# Altium PCB Display_SACA.PcbDoc (part 2 of 2)
Units mm, origin at the board's own origin, x right, y up, seen from the top; angles counter-clockwise.
Board outline 138.94 x 67.56 mm, 2 copper layers (Top Layer, Bottom Layer); 92 components, 109 nets, 417 pads, 161 vias.
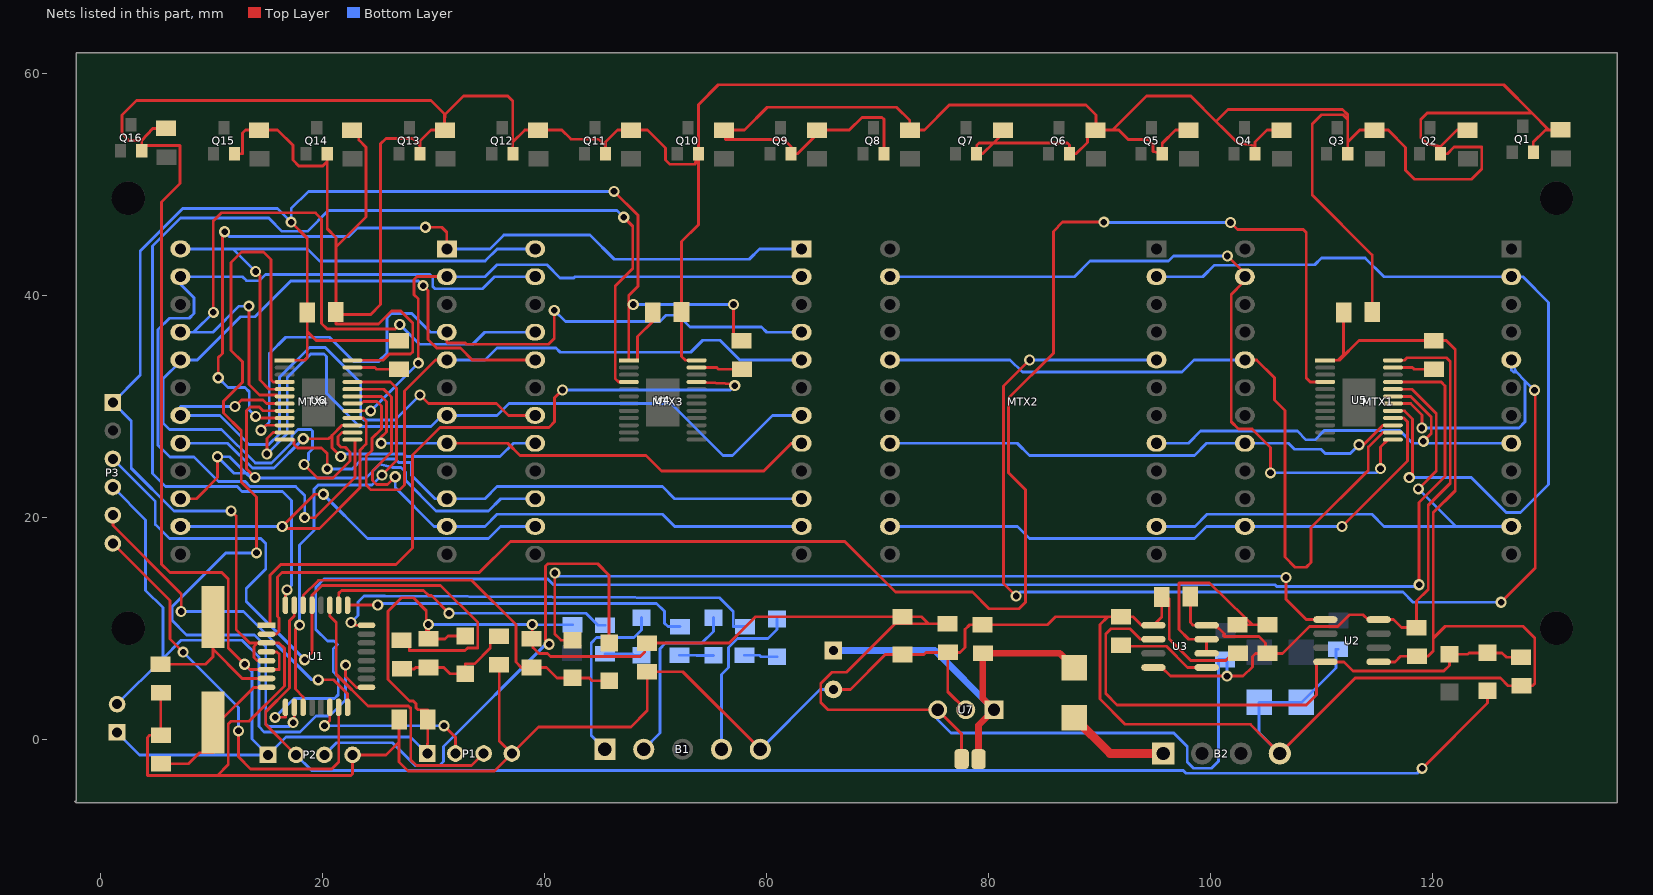
[diagram p2: the nets of this part, all layers, seen from the top]

## Via types
v1: diameter 1, hole 0.6, Top Layer to Bottom Layer, 161 vias

## Nets (pads, with @x,y where several pads share a name; then routed paths per layer and width w, separated by ;. In a path a pad name is that pad's centre, name@x,y a point inside that pad or via, vN(x,y) a via of type N, cw(c..) or ccw(c..) an arc to the next point about the centre after c; other vN are vias at no path point) (continued)
F8: MTX1.23 MTX2.23 U5.13 | length 67.5
  Top Layer w0.254: v1(101.533,43.545) 103.111,41.967 MTX1.23@103.111,41.68 102.956,41.68 102.956,41.162 101.884,40.091 101.884,28.61 102.544,27.949 103.768,27.949 105.419,26.298 v1(105.419,24.012) ; v1(115.325,24.393) 115.325,26.337 115.986,26.997 U5.13@116.447,26.997
  Bottom Layer w0.254: MTX2.23@71.149,41.68 87.766,41.68 89.174,43.088 96.225,43.088 96.682,43.545 v1(101.533,43.545) ; v1(105.419,24.012) 114.944,24.012 v1(115.325,24.393)
F9: MTX1.20 MTX2.20 U5.14 | length 71
  Top Layer w0.254: MTX1.20@103.111,34.18 104.175,34.18 105.772,32.583 105.772,30.567 106.715,29.624 106.715,16.418 107.629,15.503 108.645,15.503 109.077,15.935 109.077,19.085 114.233,24.241 114.233,26.342 115.538,27.647 U5.14@116.447,27.647
  Bottom Layer w0.254: MTX2.20@71.149,34.18 81.968,34.18 83.067,33.08 97.444,33.08 98.544,34.18 MTX1.20@103.111,34.18
F10: MTX1.17 MTX2.17 U5.15 | length 47.6
  Top Layer w0.254: v1(113.385,26.542) 113.791,26.542 115.546,28.297 U5.15@116.447,28.297
  Bottom Layer w0.254: MTX2.17@71.149,26.68 82.61,26.68 83.702,25.587 98.561,25.587 99.654,26.68 MTX1.17@103.111,26.68 107.046,26.68 107.59,26.136 109.975,26.136 110.347,25.764 112.607,25.764 v1(113.385,26.542)
F11: MTX1.14 MTX2.14 U5.16 | length 54.9
  Top Layer w0.254: v1(111.856,19.18) 117.764,25.088 117.764,28.61 117.427,28.947 U5.16@116.447,28.947
  Bottom Layer w0.254: MTX2.14@71.149,19.18 82.617,19.18 83.702,18.094 98.568,18.094 99.654,19.18 MTX1.14@103.111,19.18 v1(111.856,19.18)
F12: MTX1.2 MTX2.2 U5.17 | length 76.5
  Top Layer w0.254: U5.17@116.447,29.597 117.477,29.597 118.218,28.857 118.218,23.882 v1(117.916,23.581)
  Bottom Layer w0.254: MTX2.2@95.149,41.68 99.322,41.68 100.36,42.718 102.63,42.718 102.67,42.758 109.412,42.758 110.017,43.362 113.948,43.362 115.63,41.68 MTX1.2@127.111,41.68 128.152,41.68 130.475,39.358 130.475,22.957 127.949,20.431 126.654,20.431 123.504,23.581 v1(117.916,23.581)
F13: MTX1.5 MTX2.5 U5.18 | length 121.1
  Top Layer w0.254: v1(82.509,12.913) 81.366,14.056 81.366,31.821 v1(83.725,34.18) ; U5.18@116.447,30.247 118.046,30.247 119.059,29.234 v1(119.059,28.051) ; v1(126.197,12.354) 129.27,15.427 129.27,31.378 v1(129.194,31.455)
  Bottom Layer w0.254: v1(82.509,12.913) 82.864,13.268 117.357,13.268 118.272,12.354 v1(126.197,12.354) ; v1(83.725,34.18) MTX2.5@95.149,34.18 ; v1(119.059,28.051) 127.797,28.051 128.356,28.61 128.356,32.293 ; v1(129.194,31.455) 128.356,32.293 ; 127.568,33.08 128.356,32.293 ; 127.568,33.08 MTX1.5@127.111,34.18 127.111,33.283 127.314,33.08 127.568,33.08
F14: MTX1.8 MTX2.8 U5.19 | length 40.5
  Top Layer w0.254: U5.19@116.447,30.897 118.052,30.897 119.897,29.052 119.897,27.568 v1(119.187,26.857)
  Bottom Layer w0.254: MTX2.8@95.149,26.68 98.029,26.68 99.12,27.772 107.847,27.772 108.634,26.984 109.422,26.984 110.262,27.823 117.065,27.823 118.208,26.68 v1@119.364,26.68 ; v1(119.187,26.857) v1@119.364,26.68 ; MTX1.8@127.111,26.68 v1@119.364,26.68
F15: MTX1.11 MTX2.11 U5.20 | length 49.9
  Top Layer w0.254: U5.20@116.447,31.547 118.154,31.547 120.351,29.35 120.351,24.173 v1(118.743,22.565)
  Bottom Layer w0.254: MTX2.11@95.149,19.18 98.606,19.18 99.704,20.279 114.557,20.279 115.656,19.18 122.128,19.18 ; v1(118.743,22.565) 122.128,19.18 ; MTX1.11@127.111,19.18 122.128,19.18
GND: B1.5 B2.4 C1.1 C2.1 C3.1 C4.1 C5.1 C6.1 C7.1 C8.2 C9.2 C10.2 C11.2 C12.1 C13.1 C14.1 C15.1 C16.1 P1.4 P2.4 P3.1 R9.1 R10.1 R16.1 R29.1 R30.1 TVS1.1 TVS2.1 U1.3 U1.5 U2.5 U3.1 U4.1 U5.1 U6.1 U7.3 | length 453.7
  Top Layer w0.254: C1.1@5.461,4.191 C2.1@5.461,0.381 4.47,0.381 4.251,0.162 4.251,-3.242 10.576,-3.242 ; v1(11.801,20.583) 12.252,20.133 12.252,9.915 13.481,8.687 14.157,8.687 ; U1.5@14.986,7.087 14.157,7.087 13.852,7.392 13.852,8.382 14.157,8.687 ; U6.1@16.621,34.147 18.424,34.147 18.653,34.376 18.653,36.738 ; v1(17.205,46.593) 18.653,45.145 C14.1@18.653,38.465 18.653,36.738 ; R30.1@26.908,35.925 19.466,35.925 18.653,36.738 ; C12.1@26.924,1.778 26.924,-0.229 ; C3.1@35.941,6.731 35.941,-0.127 P1.4@37.084,-1.27 ; v1(46.288,49.362) 48.433,47.217 48.433,40.813 47.609,39.989 47.609,38.77 ; v1(48.015,39.176) 47.609,38.77 ; C15.1@49.784,38.465 49.784,37.662 48.403,36.281 48.403,34.147 U4.1@47.625,34.147 47.609,34.147 47.609,38.77 ; v1(57.052,39.176) 57.052,35.925 R16.1@57.785,35.925 ; B1.5@59.466,-0.889 52.481,6.096 C13.1@49.276,6.096 49.276,2.6 47.803,1.127 39.481,1.127 P1.4@37.084,-1.27 ; C9.2@66.04,4.501 67.573,4.501 70.721,7.649 C11.2@72.263,7.649 74.203,7.649 74.387,7.833 C10.2@76.354,7.833 ; U7.3@77.978,2.667 76.354,4.291 C10.2@76.354,7.833 ; C5.1@95.631,12.827 C5.1@95.631,12.633 ; C7.1@102.489,7.747 102.016,7.747 101.389,7.12 98.231,7.12 96.301,9.05 96.301,12.633 C5.1@95.631,12.633 ; U5.1@110.347,34.147 111.49,34.147 ; C16.1@111.998,38.465 111.998,34.655 111.49,34.147 ; U2.5@115.163,6.985 116.621,6.985 117.129,7.493 C4.1@118.618,7.493 119.618,7.493 120.075,7.95 120.075,7.961 ; 10.576,-3.242 22.606,-3.242 22.733,-3.115 P2.4@22.733,-1.397 25.756,-1.397 26.924,-0.229 ; 10.576,-3.242 11.541,-2.277 11.541,1.381 11.795,1.635 13.419,1.635 16.592,4.809 16.592,8.208 16.113,8.687 U1.3@14.986,8.687 14.157,8.687 ; 26.924,-0.229 26.924,-2.038 27.722,-2.835 35.519,-2.835 P1.4@37.084,-1.27 ; C10.2@76.354,7.833 77.454,7.833 77.911,8.29 77.911,9.915 78.324,10.328 C8.2@79.475,10.328 85.328,10.328 86.049,11.049 90.764,11.049 ; 90.764,11.049 C6.1@91.948,11.049 93.024,11.049 93.786,10.287 U3.1@94.869,10.287 95.631,11.049 C5.1@95.631,12.633 ; 90.764,11.049 90.056,10.341 90.056,3.638 92.337,1.357 103.631,1.357 B2.4@106.258,-1.27 113.049,5.521 126.136,5.521 126.832,4.826 R9.1@128.016,4.826 129.007,4.826 129.219,5.039 129.219,9.128 128.152,10.195 121.167,10.195 120.086,9.114 ; 111.49,34.147 111.617,34.147 113.395,35.925 R29.1@120.126,35.925 121.248,35.925 122.061,35.112 122.061,22.401 120.086,20.426 120.086,9.114 ; 120.075,7.961 120.075,9.103 120.086,9.114 ; 120.075,7.961 120.086,7.961 120.086,9.114
  Bottom Layer w0.254: v1(11.801,20.583) 6.639,20.583 2.803,24.419 2.803,28.693 P3.1@1.143,30.353 3.616,32.826 3.616,43.984 7.445,47.812 15.986,47.812 v1(17.205,46.593) 17.205,47.812 18.755,49.362 v1(46.288,49.362) ; v1(48.015,39.176) v1(57.052,39.176) ; B1.5@59.466,-0.889 64.856,4.501 C9.2@66.04,4.501 ; B2.4@106.258,-1.27 104.394,0.594 TVS1.1@104.394,3.338 106.283,3.338 TVS2.1@108.204,3.338 111.312,6.446 111.312,8.128 R10.1@111.506,8.128
LED1W: B1.4 D3.2 | length 15.4
  Bottom Layer w0.254: B1.4@55.966,-0.889 55.966,5.852 56.601,6.486 56.601,8.29 57.413,9.103 60.147,9.103 60.96,9.915 D3.2@60.96,10.846
LED_G: R3.1 U1.25 | length 31.5
  Top Layer w0.254: U1.25@22.286,12.087 22.286,12.1 v1(25.003,12.1)
  Bottom Layer w0.254: v1(25.003,12.1) 25.155,12.252 50.124,12.252 50.835,11.541 50.835,10.465 51.14,10.16 R3.1@52.224,10.16
LED_R: R4.1 U1.26 | length 26.5
  Top Layer w0.254: U1.26@21.486,12.087 21.486,13.167 21.74,13.421 29.13,13.421 29.6,12.95 29.842,12.95 v1(31.429,11.363)
  Bottom Layer w0.254: v1(31.429,11.363) 43.774,11.363 44.85,10.287 R4.1@45.493,10.287
LEDGOUT: B1.2 D4.2 | length 16.4
  Bottom Layer w0.254: B1.2@48.966,-0.889 50.428,0.573 50.428,8.163 50.936,8.671 54.188,8.671 55.245,9.728 D4.2@55.245,10.971
LEDROUT: B1.1 D5.2 | length 16.2
  Bottom Layer w0.254: B1.1@45.466,-0.889 44.231,0.346 44.231,8.696 44.713,9.179 48.092,9.179 48.768,9.855 D5.2@48.768,10.971
MISO: P3.5 U1.16 | length 30.5
  Top Layer w0.254: P3.5@1.143,20.193 1.143,19.263 7.299,13.106 v1(7.299,11.516) ; v1(19.644,5.369) 21.034,5.369 22.286,4.116 U1.16@22.286,2.887
  Bottom Layer w0.254: v1(7.299,11.516) 12.908,11.516 19.055,5.369 v1(19.644,5.369)
MOSI: P3.6 U1.15 | length 38.6
  Top Layer w0.254: P3.6@1.143,17.653 6.283,12.513 6.283,9.052 v1(7.477,7.858) ; v1(12.455,0.771) 12.455,-1.565 13.548,-2.658 20.863,-2.658 21.486,-2.034 U1.15@21.486,2.887
  Bottom Layer w0.254: v1(7.477,7.858) 12.455,2.88 v1(12.455,0.771)
NetC1_2: C1.2 U1.7 Y1.2 | length 14.5
  Top Layer w0.254: C1.2@5.434,6.772 9.484,6.772 10.16,7.448 10.16,8.128 ; Y1.2@10.16,11.024 10.16,8.128 ; U1.7@14.986,5.487 12.801,5.487 10.16,8.128
NetC2_2: C2.2 U1.8 Y1.1 | length 14
  Top Layer w0.254: C2.2@5.488,-2.2 7.934,-2.2 8.924,-1.21 10.16,-1.21 Y1.1@10.16,1.524 10.668,1.524 13.831,4.687 U1.8@14.986,4.687
NetC3_2: C3.2 D6.1 R5.1 R6.1 | length 11.6
  Top Layer w0.254: R6.1@27.178,6.35 28.305,6.35 28.432,6.477 R5.1@29.591,6.477 30.947,6.477 31.504,5.92 D6.1@32.893,5.92 32.893,6.807 33.706,6.807 35.138,8.239 35.138,9.312 C3.2@35.914,9.312
NetC6_2: C6.2 U3.5 | length 8.5
  Top Layer w0.254: C6.2@91.975,8.468 92.899,8.39 96.047,8.39 97.96,6.477 U3.5@99.669,6.477
NetC7_2: C7.2 R11.2 U3.6 U3.7 | length 19.1
  Top Layer w0.254: U3.6@99.669,7.747 U3.7@99.669,9.017 98.063,9.017 97.164,9.915 97.164,14.081 99.933,14.081 103.109,10.994 103.794,10.328 ; C7.2@102.462,10.328 103.794,10.328 ; R11.2@105.129,10.328 103.794,10.328
NetC8_1: C8.1 C9.1 D9.2 SJ1.1 U7.1 | length 36
  Top Layer w0.6: SJ1.1@79.121,-1.778 79.121,1.27 U7.1@80.518,2.667 79.502,3.683 C8.1@79.502,7.747 86.451,7.747 D9.2@87.757,6.441
  Bottom Layer w0.6: C9.1@66.04,8.001 75.184,8.001 U7.1@80.518,2.667
NetD3_1: D3.1 R2.2 | length 3
  Bottom Layer w0.254: R2.2@58.039,7.579 59.379,7.579 59.512,7.446 D3.1@60.96,7.446
NetD4_1: D4.1 R3.2 | length 3.1
  Bottom Layer w0.254: R3.2@52.197,7.579 53.705,7.579 53.713,7.571 D4.1@55.245,7.571
NetD5_1: D5.1 R4.2 | length 3.4
  Bottom Layer w0.254: R4.2@45.466,7.706 47.96,7.706 48.095,7.571 D5.1@48.768,7.571
NetP1_2: P1.2 U1.14 | length 15.6
  Top Layer w0.254: v1(20.202,1.229) 20.686,1.712 U1.14@20.686,2.887 ; v1(30.972,1.229) 32.004,0.197 P1.2@32.004,-1.27
  Bottom Layer w0.254: v1(20.202,1.229) v1(30.972,1.229)
NetP1_3: P1.3 U1.27 | length 26.3
  Top Layer w0.254: U1.27@20.686,12.087 20.686,11.123 21.269,10.54 21.269,5.874 24.138,3.005 27.772,3.005 27.975,2.802 27.975,-1.845 28.483,-2.353 33.461,-2.353 P1.3@34.544,-1.27
NetR2_1: R2.1 U1.24 | length 40.5
  Top Layer w0.254: v1(22.59,10.525) 22.828,10.287 U1.24@23.986,10.287
  Bottom Layer w0.254: v1(22.59,10.525) 23.214,11.149 23.214,12.382 23.758,12.927 25.638,12.927 55.813,12.735 57.032,11.516 57.032,10.16 R2.1@58.066,10.16
NetR16_2: R16.2 U4.23 | length 4.2
  Top Layer w0.254: U4.23@53.725,33.497 55.533,33.497 55.686,33.344 R16.2@57.812,33.344
NetR29_2: R29.2 U5.23 | length 3.8
  Top Layer w0.254: U5.23@116.447,33.497 118.221,33.497 118.374,33.344 R29.2@120.153,33.344
NetR30_2: R30.2 U6.23 | length 4.3
  Top Layer w0.254: U6.23@22.721,33.497 24.749,33.497 24.902,33.344 R30.2@26.935,33.344
NetU1_1: U1.1 U4.21 | length 63.5
  Top Layer w0.254: U1.1@14.986,10.287 15.3,10.287 15.3,14.792 16.265,15.757 26.654,15.757 28.127,17.231 28.127,25.613 30.616,28.102 40.421,28.102 40.929,28.61 40.929,30.769 v1(41.64,31.48) ; U4.21@53.725,32.197 57.159,32.019 v1(57.159,31.861)
  Bottom Layer w0.254: v1(41.64,31.48) 56.778,31.48 v1(57.159,31.861)
NetU1_2: U1.2 U5.4 | length 151.8
  Top Layer w0.254: U1.2@14.986,9.487 15.888,9.487 16.113,9.712 16.113,10.931 15.986,11.058 15.986,14.614 16.392,15.021 34.147,15.021 36.966,17.84 67.065,17.84 71.637,13.268 78.572,13.268 80.07,11.77 82.763,11.77 83.347,12.354 83.347,22.488 81.82,24.016 81.82,30.743 85.864,34.788 85.864,45.757 86.7,46.593 v1(90.408,46.593) ; v1(101.813,46.568) 102.448,45.933 108.366,45.933 108.645,45.653 108.645,32.553 109.001,32.197 U5.4@110.347,32.197
  Bottom Layer w0.254: v1(90.408,46.593) 90.433,46.568 v1(101.813,46.568)
NetU1_9: U1.9 U5.21 | length 143.3
  Top Layer w0.254: v1(15.757,1.991) 16.686,1.991 U1.9@16.686,2.887 ; U5.21@116.447,32.197 120.805,32.197 121.153,31.849 121.153,23.679 118.805,21.331 v1(118.805,13.929)
  Bottom Layer w0.254: v1(15.757,1.991) 17.459,3.692 21.117,3.692 21.447,4.023 21.447,5.648 20.99,6.105 20.99,8.149 21.385,8.544 21.066,8.863 20.468,8.863 19.415,9.915 19.415,13.675 20.177,14.437 40.319,14.437 40.827,13.929 105.823,13.929 105.989,13.762 118.639,13.762 v1(118.805,13.929)
NetU1_10: U1.10 U6.4 | length 76.3
  Top Layer w0.254: v1(14.081,16.799) 14.081,21.828 12.709,23.2 12.709,27.797 11.109,29.397 11.109,30.464 12.811,32.166 12.811,34.02 11.795,35.036 11.795,42.961 12.735,43.901 14.716,43.901 15.376,43.24 15.376,32.4 15.58,32.197 U6.4@16.621,32.197 ; v1(17.383,1.508) 17.486,1.611 U1.10@17.486,2.887
  Bottom Layer w0.254: v1(14.081,16.799) 11.312,16.799 6.461,11.947 6.461,10.728 7.782,9.407 13.903,9.407 14.919,8.391 14.919,1.381 15.148,1.152 17.027,1.152 v1(17.383,1.508)
NetU1_11: U1.11 U6.21 | length 39.9
  Top Layer w0.254: v1(17.967,10.296) 17.586,9.915 17.586,4.531 18.286,3.831 U1.11@18.286,2.887 ; U6.21@22.721,32.197 26.146,32.197 26.695,31.648 26.695,25.12 v1(25.384,23.809)
  Bottom Layer w0.254: v1(17.967,10.296) 17.967,17.518 19.274,18.825 19.274,22.539 19.644,22.909 24.484,22.909 v1(25.384,23.809)
NetU1_32: U1.32 U4.4 | length 105.6
  Top Layer w0.254: U1.32@16.686,12.087 16.686,13.333 v1(16.824,13.471) ; v1(47.166,47.031) 47.979,46.218 47.979,42.413 46.39,40.824 46.39,32.521 46.714,32.197 U4.4@47.625,32.197
  Bottom Layer w0.254: v1(16.824,13.471) 17.231,13.878 17.231,21.523 16.429,22.325 12.79,22.325 12.347,22.768 5.878,22.768 4.708,23.938 4.708,44.434 7.238,46.964 15.18,46.964 16.378,45.766 18.679,45.766 20.545,47.632 46.565,47.632 v1(47.166,47.031)
R0: MTX3.24 MTX4.24 U6.5 | length 48.2
  Top Layer w0.254: v1(14.005,42.148) 14.389,41.764 14.389,32.379 15.221,31.547 U6.5@16.621,31.547
  Bottom Layer w0.254: MTX4.24@7.226,44.18 11.973,44.18 ; v1(14.005,42.148) 11.973,44.18 ; MTX3.24@39.188,44.18 35.773,44.18 34.68,43.088 19.771,43.088 18.678,44.18 11.973,44.18
R1: MTX3.21 MTX4.21 U6.6 | length 69.2
  Top Layer w0.254: v1(10.195,38.465) 10.195,46.72 10.906,47.431 19.39,47.431 19.948,46.872 19.948,37.474 20.456,36.966 26.578,36.966 v1(26.984,37.373) ; v1(13.395,39.024) 13.395,31.975 14.348,31.023 15.91,31.023 15.91,30.897 U6.6@16.621,30.897
  Bottom Layer w0.254: MTX4.21@7.226,36.68 8.41,36.68 ; v1(10.195,38.465) 8.41,36.68 ; v1(13.395,39.024) 12.513,39.024 10.169,36.68 8.41,36.68 ; v1(26.984,37.373) 28.762,35.595 33.563,35.595 34.648,36.68 MTX3.21@39.188,36.68
R2: MTX3.18 MTX4.18 U6.7 | length 56.5
  Top Layer w0.254: v1(12.151,29.993) 12.723,30.566 14.677,30.566 14.995,30.247 U6.7@16.621,30.247 ; v1(28.813,31.023) 29.575,30.261 35.696,30.261 36.777,29.18 MTX3.18@39.188,29.18
  Bottom Layer w0.254: v1(12.151,29.993) 7.226,29.993 MTX4.18@7.226,29.18 10.807,29.18 13.421,26.567 15.188,26.567 16.146,27.525 16.146,32.616 18.846,35.315 20.279,35.315 23.479,32.115 23.479,28.999 23.708,28.77 26.56,28.77 v1(28.813,31.023)
R3: MTX3.15 MTX4.15 U6.8 | length 52.7
  Top Layer w0.254: MTX4.15@7.226,21.68 8.671,21.68 10.576,23.585 v1(10.576,25.46) ; v1(13.954,23.606) 13.178,24.382 13.178,29.626 13.508,29.956 14.332,29.956 14.691,29.597 U6.8@16.621,29.597
  Bottom Layer w0.254: v1(13.954,23.606) 13.581,23.979 13.143,23.979 ; MTX3.15@39.188,21.68 36.082,21.68 34.985,20.583 30.264,20.583 27.508,23.339 27.508,24.077 27.101,24.484 26.363,24.484 25.189,24.796 23.933,23.541 13.581,23.541 13.143,23.979 ; 13.143,23.979 12.057,23.979 v1(10.576,25.46) 11.662,25.46 13.143,23.979
R4: MTX3.1 MTX4.1 U6.9 | length 77.8
  Top Layer w0.254: v1(10.638,32.572) 10.638,34.39 11.022,34.774 11.022,45.54 v1(11.211,45.729) ; v1(14.005,29.099) 14.157,28.947 U6.9@16.621,28.947 ; v1(29.296,46.136) 30.769,46.136 31.226,45.679 MTX4.1@31.226,44.18
  Bottom Layer w0.254: v1(10.638,32.572) 11.513,31.697 13.047,31.697 13.432,31.313 13.432,29.673 v1(14.005,29.099) ; v1(11.211,45.729) 11.631,45.309 22.426,45.309 23.183,46.066 29.226,46.066 v1(29.296,46.136) ; MTX4.1@31.226,44.18 35.112,44.18 36.361,45.429 44.129,45.429 46.303,43.255 58.471,43.255 59.397,44.18 MTX3.1@63.188,44.18
R5: MTX3.4 MTX4.4 U6.10 | length 68.4
  Top Layer w0.254: v1(14.487,27.848) 14.937,28.297 U6.10@16.621,28.297 ; MTX4.4@31.226,36.68 31.226,35.798 31.313,35.711 32.907,35.711 33.023,35.595 40.37,35.595 40.903,36.128 v1(40.903,38.643)
  Bottom Layer w0.254: v1(14.487,27.848) 15.238,28.599 15.238,34.749 16.719,36.23 20.667,36.23 22.876,34.02 25.054,34.02 25.827,34.793 25.827,37.957 26.233,38.363 28.065,38.363 29.749,36.68 MTX4.4@31.226,36.68 ; v1(40.903,38.643) 41.916,37.63 50.413,37.63 50.995,38.213 52.067,38.213 53.127,37.152 59.576,37.152 60.048,36.68 MTX3.4@63.188,36.68
R6: MTX3.7 MTX4.7 U6.11 | length 67
  Top Layer w0.254: v1(15.021,25.714) 15.021,27.097 15.571,27.647 U6.11@16.621,27.647
  Bottom Layer w0.254: v1(15.021,25.714) 16.855,27.548 16.855,32.603 18.972,34.72 20.148,34.72 20.375,34.494 20.375,31.186 23.372,28.189 29.792,28.189 30.783,29.18 MTX4.7@31.226,29.18 35.747,29.18 36.828,30.261 51.419,30.261 56.119,25.56 56.945,25.56 60.565,29.18 MTX3.7@63.188,29.18
R7: MTX3.10 MTX4.10 U6.12 | length 52.1
  Top Layer w0.254: U6.12@16.621,26.997 17.471,26.997 17.471,26.578 17.801,26.248 19.948,26.248 20.456,25.74 v1(20.456,24.368)
  Bottom Layer w0.254: v1(20.456,24.368) 22.706,24.368 23.588,25.25 26.584,25.25 26.897,24.938 27.983,24.938 28.023,24.898 28.023,23.811 30.154,21.68 MTX4.10@31.226,21.68 34.655,21.68 35.743,22.768 50.657,22.768 51.745,21.68 MTX3.10@63.188,21.68
R8: MTX3.23 MTX4.23 U6.13 | length 78.6
  Top Layer w0.254: v1(18.424,19.974) 19.339,19.974 22.957,23.592 22.957,26.997 U6.13@22.721,26.997
  Bottom Layer w0.254: v1(18.424,19.974) 18.424,21.966 17.612,22.779 13.511,22.779 13.065,23.225 10.652,23.225 8.442,25.435 6.283,25.435 5.216,26.502 5.216,36.916 6.232,37.932 8.021,37.932 8.453,38.363 8.453,39.778 7.226,41.005 MTX4.23@7.226,41.68 12.819,41.68 13.178,41.321 14.36,41.321 14.908,41.869 29.702,41.869 29.956,41.615 29.956,40.802 30.159,40.599 34.452,40.599 35.533,41.68 MTX3.23@39.188,41.68
R9: MTX3.20 MTX4.20 U6.14 | length 76.3
  Top Layer w0.254: v1(18.374,24.756) 19.589,23.541 20.964,23.541 22.503,25.079 22.503,25.892 22.082,26.313 21.69,26.313 21.412,26.59 21.412,27.272 21.787,27.647 U6.14@22.721,27.647 ; v1(29.092,40.878) 29.545,40.425 29.545,36.031 30.319,35.257 32.445,35.257 33.522,34.18 MTX3.20@39.188,34.18
  Bottom Layer w0.254: v1(18.374,24.756) 18.78,25.163 18.78,25.805 19.136,26.16 19.136,27.772 18.983,27.924 17.837,27.924 17.288,27.375 17.288,26.742 15.433,24.887 13.978,24.887 10.941,27.924 6.232,27.924 5.672,28.485 5.672,32.491 7.226,34.045 MTX4.20@7.226,34.18 8.747,34.18 12.633,38.066 13.954,38.066 17.172,41.284 28.686,41.284 v1(29.092,40.878)
R10: MTX3.17 MTX4.17 U6.15 | length 38.4
  Top Layer w0.254: v1(18.298,27.086) 20.584,27.086 20.888,27.39 ; v1(21.676,25.486) 20.888,26.273 20.888,27.39 ; U6.15@22.721,28.297 21.795,28.297 20.888,27.39
  Bottom Layer w0.254: MTX4.17@7.226,26.68 11.468,26.68 13.715,24.433 15.645,24.433 v1(18.298,27.086) ; v1(21.676,25.486) 21.894,25.704 27.365,25.704 27.584,25.486 36.027,25.486 37.221,26.68 MTX3.17@39.188,26.68
R11: MTX3.14 MTX4.14 U6.16 | length 51.5
  Top Layer w0.254: v1(20.101,22.082) 19.301,22.082 v1(16.399,19.18) 16.57,19.009 19.745,19.009 23.411,22.674 23.411,26.048 23.962,26.599 23.962,28.693 23.708,28.947 U6.16@22.721,28.947
  Bottom Layer w0.254: MTX4.14@7.226,19.18 v1(16.399,19.18) ; v1(20.101,22.082) 24.089,18.094 34.966,18.094 36.052,19.18 MTX3.14@39.188,19.18
R12: MTX3.2 MTX4.2 U6.17 | length 51.4
  Top Layer w0.254: U6.17@22.721,29.597 v1(24.368,29.597) ; v1(28.661,33.89) 28.661,39.656 28.265,40.051 28.265,41.411 28.559,41.705 30.29,41.705 30.315,41.68 MTX4.2@31.226,41.68
  Bottom Layer w0.254: v1(24.368,29.597) v1(28.661,33.89) ; MTX4.2@31.226,41.68 34.655,41.68 35.733,42.758 40.24,42.758 41.423,41.575 42.696,41.575 42.801,41.68 MTX3.2@63.188,41.68
R13: MTX3.5 MTX4.5 U6.18 | length 61.5
  Top Layer w0.254: U6.18@22.721,30.247 23.53,30.247 23.721,30.439 24.927,30.439 25.333,30.032 25.333,27.975 24.481,27.122 24.481,26.03 23.973,25.522 23.973,22.92 24.412,22.481 26.972,22.481 27.411,22.92 27.411,31.381 30.21,34.18 MTX4.5@31.226,34.18
  Bottom Layer w0.254: MTX4.5@31.226,34.18 34.655,34.18 35.74,35.265 41.045,35.265 41.439,34.87 53.204,34.87 54.284,35.95 55.842,35.95 57.612,34.18 MTX3.5@63.188,34.18
R14: MTX3.8 MTX4.8 U6.19 | length 47.2
  Top Layer w0.254: U6.19@22.721,30.897 25.329,30.897 25.787,30.439 25.787,27.695 25.308,27.216 v1(25.308,26.68) ; MTX4.8@31.226,26.68 36.712,26.68 37.805,25.587 49.181,25.587 50.578,24.19 59.776,24.19 62.265,26.68 MTX3.8@63.188,26.68
  Bottom Layer w0.254: v1(25.308,26.68) MTX4.8@31.226,26.68
R15: MTX3.11 MTX4.11 U6.20 | length 54.4
  Top Layer w0.254: U6.20@22.721,31.547 25.539,31.547 26.241,30.845 26.241,25.886 24.546,24.19 24.546,23.327 24.901,22.971 25.892,22.971 v1(26.578,23.657)
  Bottom Layer w0.254: v1(26.578,23.657) 26.578,22.685 30.083,19.18 MTX4.11@31.226,19.18 34.655,19.18 35.754,20.279 50.657,20.279 51.756,19.18 MTX3.11@63.188,19.18
RSTAVR: P3.3 R6.2 U1.29 | length 64.5
  Top Layer w0.254: v1(18.424,7.172) 19.086,7.834 U1.29@19.086,12.087 19.086,12.99 19.971,13.875 30.67,13.875 34.02,10.525 34.02,8.239 33.106,8.239 32.877,8.01 27.848,8.01 27.848,8.931 R6.2@27.151,8.931
  Bottom Layer w0.254: P3.3@1.143,25.273 4.97,21.446 4.97,19.356 6.232,18.094 14.462,18.094 14.919,17.637 14.919,15.34 13.152,13.573 13.152,12.444 v1(18.424,7.172)
RX485: D1.2 U2.1 | length 79.6
  Top Layer w0.254: v1(40.954,14.995) 40.954,9.509 41.524,8.939 D1.2@42.545,8.939 ; v1(106.816,14.589) 106.816,12.624 108.645,10.795 U2.1@110.363,10.795
  Bottom Layer w0.254: v1(40.954,14.995) 41.255,14.695 106.71,14.695 v1(106.816,14.589)
RXD: D2.2 P2.3 | length 46.4
  Top Layer w0.254: v1(40.446,8.569) 40.116,8.899 40.116,15.605 40.333,15.822 44.817,15.822 45.847,14.792 D2.2@45.847,8.685
  Bottom Layer w0.254: P2.3@20.193,-1.397 21.295,-0.295 26.33,-0.295 28.381,-2.347 30.566,-2.347 30.921,-1.991 30.921,-0.651 40.141,8.569 v1(40.446,8.569)
RXD0: D1.1 D2.1 R1.1 U1.30 | length 34.7
  Top Layer w0.254: U1.30@18.286,12.087 18.286,12.952 19.663,14.329 33.468,14.329 37.449,10.347 37.449,6.96 37.932,6.477 R1.1@38.862,6.477 40.218,6.477 41.156,5.539 D1.1@42.545,5.539 44.053,5.539 44.307,5.285 D2.1@45.847,5.285
SCK: LS1.2 P3.4 U1.17 | length 55
  Top Layer w0.254: v1(22.107,6.69) 22.107,5.678 23.098,4.687 U1.17@23.986,4.687
  Bottom Layer w0.254: P3.4@1.143,22.733 4.099,19.777 4.099,13.421 5.648,11.871 5.648,7.299 ; LS1.2@1.524,3.175 5.648,7.299 ; v1(22.107,6.69) 22.107,3.547 20.654,2.094 19.428,2.094 18.015,0.681 14.767,0.681 14.298,1.149 14.298,7.416 12.78,8.934 7.283,8.934 5.648,7.299
TX485: D7.2 D8.2 R9.2 U2.4 U3.2 | length 53.2
  Top Layer w0.254: U3.2@94.869,9.017 93.719,9.017 92.77,9.966 91.043,9.966 90.586,9.509 90.586,4.124 91.602,3.108 108.645,3.108 109.56,4.023 109.56,6.985 U2.4@110.363,6.985 112.033,6.985 112.862,6.156 121.031,6.156 121.539,6.664 D7.2@121.539,7.669 123.174,7.669 123.301,7.796 D8.2@124.968,7.796 126.273,7.796 126.662,7.407 R9.2@127.989,7.407
TXD0: D8.1 P2.2 U1.31 | length 127.4
  Top Layer w0.254: U1.31@17.486,12.087 17.486,11.123 17.046,10.684 17.046,4.621 14.917,2.491 14.917,1.339 P2.2@17.653,-1.397 ; v1(119.085,-2.607) 124.968,3.277 D8.1@124.968,4.396
  Bottom Layer w0.254: P2.2@17.653,-1.397 19.057,-2.801 97.558,-2.801 97.808,-3.051 118.64,-3.051 v1(119.085,-2.607)
VCC: C4.2 C5.2 C10.1 C11.1 C12.2 C13.2 C14.2 C15.2 C16.2 D6.2 LS1.1 P1.1 P2.1 Q1.3 Q2.3 Q3.3 Q4.3 Q5.3 Q6.3 Q7.3 Q8.3 Q9.3 Q10.3 Q11.3 Q12.3 Q13.3 Q14.3 Q15.3 Q16.3 R1.2 R5.2 R7.2 R8.2 R11.1 R12.2 R13.2 R14.2 R15.2 R17.2 R18.2 R19.2 R20.2 R21.2 R22.2 R23.2 R24.2 R25.2 R26.2 R27.2 R28.2 SJ1.2 U1.4 U1.6 U2.8 U3.4 U3.8 U4.24 U5.24 U6.24 U7.2 | length 774.1
  Top Layer w0.254: Q16.3@3.744,53.022 Q16.3@3.744,53.502 ; R28.2@5.942,55.032 4.734,55.032 3.744,53.959 ; Q15.3@12.101,52.752 12.811,52.752 12.811,54.619 13.081,54.889 R27.2@14.315,54.889 15.986,54.889 17.358,53.517 17.358,52.181 17.891,51.648 20.05,51.648 20.457,52.055 ; U1.4@14.986,7.887 15.932,7.887 16.138,7.68 16.138,6.287 U1.6@14.986,6.287 13.497,6.287 v1(13.014,6.77) 11.541,8.243 11.541,14.437 10.957,15.021 6.283,15.021 5.521,15.783 5.521,48.396 7.196,50.071 7.196,53.502 Q16.3@3.744,53.502 ; Q14.3@20.457,52.752 20.457,52.055 ; R26.2@22.689,54.889 23.301,54.889 23.301,53.977 23.943,53.335 23.943,47.057 21.234,44.348 ; U6.24@22.721,34.147 25.486,34.147 26.044,34.706 27.949,34.706 28.153,34.909 28.153,37.503 27.075,38.581 26.233,38.581 25.076,37.424 21.234,37.424 C14.2@21.234,38.287 ; Q13.3@28.814,52.752 28.814,53.45 ; P1.1@29.464,-1.27 29.464,-0.403 29.505,-0.362 C12.2@29.505,1.805 29.505,2.676 28.635,2.676 28.456,2.855 28.456,3.21 28.207,3.459 27.853,3.459 25.917,5.394 25.917,11.541 27.13,12.754 28.21,12.754 29.372,11.592 29.372,9.058 R5.2@29.564,9.058 ; v1(29.564,10.347) R5.2@29.564,9.058 ; R25.2@31.063,54.889 R25.2@30.997,54.889 ; D6.2@32.893,9.32 31.336,9.32 31.074,9.058 R5.2@29.564,9.058 ; Q12.3@37.17,52.752 37.17,53.807 ; R1.2@38.835,9.058 R1.2@38.922,9.058 ; v1(38.922,10.347) R1.2@38.922,9.058 ; Q11.3@45.527,52.752 45.527,53.447 ; U4.24@53.725,34.147 52.721,34.147 52.365,34.503 C15.2@52.365,38.492 52.365,44.84 53.884,46.359 Q10.3@53.884,52.752 ; R22.2@56.183,54.889 R22.2@56.321,54.889 ; R21.2@64.557,54.889 R21.2@64.576,54.889 ; Q8.3@70.597,52.752 70.597,55.863 70.431,56.029 68.62,56.029 67.48,54.889 R21.2@64.576,54.889 ; R20.2@72.93,54.889 R20.2@72.933,54.889 ; C10.1@76.327,10.414 74.609,10.414 ; SJ1.2@77.597,-1.778 77.597,0.508 U7.2@75.438,2.667 65.567,2.667 64.906,3.327 64.906,5.039 65.922,6.055 67.243,6.055 71.603,10.414 74.609,10.414 ; R19.2@81.304,54.889 81.201,54.889 81.201,54.467 80.455,53.721 ; U3.4@94.869,6.477 95.629,6.477 96.407,5.699 v1(101.508,5.699) 102.956,5.699 103.794,6.537 103.794,7.477 104.064,7.747 R11.1@104.962,7.747 ; R17.2@98.051,54.889 96.86,54.889 95.667,53.696 Q5.3@95.667,52.752 94.828,52.955 94.828,53.578 94.37,54.035 92.603,54.035 91.75,54.889 91.195,54.889 ; C5.2@98.212,12.854 98.212,10.525 98.45,10.287 U3.8@99.669,10.287 100.466,10.287 101.228,9.525 101.228,9.28 104.378,9.28 104.962,8.696 R11.1@104.962,7.747 ; Q4.3@104.023,52.752 104.023,53.476 ; R15.2@106.424,54.889 105.106,54.889 104.023,53.807 104.023,53.476 ; Q3.3@112.38,52.752 112.38,53.807 ; C16.2@114.579,38.492 114.579,43.631 109.179,49.031 109.179,55.432 110.017,56.27 111.948,56.27 112.38,55.839 ; U5.24@116.447,34.147 117.484,34.147 117.713,34.376 121.277,34.376 121.607,34.045 121.607,23.069 119.632,21.095 119.632,13.511 118.577,12.455 C4.2@118.577,10.074 ; C4.2@118.591,10.074 C4.2@118.577,10.074 ; R13.2@123.171,54.889 122.224,54.889 120.736,53.401 ; Q1.3@129.093,52.895 129.093,53.807 130.191,54.905 130.483,54.905 ; R12.2@131.545,54.905 130.483,54.905 ; Q16.3@3.744,53.502 3.744,53.959 ; 3.744,53.959 2.575,53.959 1.965,54.569 1.965,56.245 3.261,57.54 29.804,57.54 31.048,56.296 ; 20.457,52.055 20.457,45.998 21.234,45.221 21.234,44.348 ; C14.2@21.234,38.287 24.368,38.287 25.257,39.176 25.257,53.65 25.74,54.133 28.131,54.133 28.814,53.45 ; C14.2@21.234,38.287 C14.2@21.234,38.492 21.234,44.348 ; 28.814,53.45 28.814,53.899 29.804,54.889 R25.2@30.997,54.889 ; R25.2@30.997,54.889 30.997,56.245 31.048,56.296 ; R25.2@30.997,54.889 30.997,54.891 31.048,56.296 ; 31.048,56.296 32.717,57.964 36.712,57.964 37.17,57.506 37.17,53.807 ; 37.17,53.807 38.253,54.889 R24.2@39.436,54.889 41.576,54.889 42.399,54.066 44.907,54.066 45.527,53.447 ; R1.2@38.922,9.058 38.973,9.058 38.973,8.29 39.533,7.73 40.301,7.73 40.554,7.477 48.65,7.477 49.057,7.883 49.057,8.677 C13.2@49.249,8.677 56.671,8.677 59.043,11.049 C11.1@72.263,11.049 73.974,11.049 74.609,10.414 ; 45.527,53.447 45.527,53.807 46.609,54.889 R23.2@47.81,54.889 49.311,54.889 50.936,53.263 50.936,52.206 51.343,51.8 53.578,51.8 Q10.3@53.884,52.752 ; Q10.3@53.884,52.752 53.884,57.167 55.679,58.963 126.425,58.963 128.965,56.423 ; R22.2@56.321,54.889 56.321,54.035 61.605,54.035 62.24,53.4 Q9.3@62.24,52.752 62.824,52.752 64.539,54.467 64.576,54.467 R21.2@64.576,54.889 ; R22.2@56.321,54.889 58.039,54.889 60.087,56.937 71.733,56.937 72.933,55.737 R20.2@72.933,54.889 ; R20.2@72.933,54.889 74.244,54.889 76.489,57.134 88.808,57.134 89.697,56.245 R18.2@89.697,54.889 ; 80.455,53.721 79.486,52.752 Q7.3@78.953,52.752 78.953,53.503 79.171,53.721 80.455,53.721 ; 80.455,53.721 87.141,53.721 87.31,53.552 Q6.3@87.31,52.752 87.893,52.752 88.923,53.781 88.923,54.889 R18.2@89.677,54.889 R18.2@89.697,54.889 ; R18.2@89.697,54.889 91.195,54.889 ; 91.195,54.889 94.253,57.947 98.231,57.947 100.504,55.673 ; 100.504,55.673 101.33,54.873 102.473,53.73 104.023,53.476 ; 100.504,55.673 101.584,56.753 111.896,56.753 112.38,56.27 112.38,55.839 ; R11.1@104.962,7.747 R11.1@105.156,7.747 106.504,7.747 108.925,10.168 111.476,10.168 112.536,11.228 113.757,11.228 114.19,10.795 U2.8@115.163,10.795 116.494,10.795 117.215,10.074 C4.2@118.577,10.074 ; 112.38,53.807 112.38,55.839 ; 112.38,53.807 113.462,54.889 R14.2@114.798,54.889 116.021,54.889 117.586,53.324 117.586,51.267 118.399,50.454 123.53,50.454 124.444,51.368 124.444,53.349 121.955,53.349 121.357,52.752 Q2.3@120.736,52.752 120.736,53.401 ; 120.736,53.401 119.491,53.68 118.958,54.213 118.958,55.839 119.542,56.423 128.965,56.423 ; 128.965,56.423 130.483,54.905
  Bottom Layer w0.254: LS1.1@1.524,0.635 3.556,-1.397 P2.1@15.113,-1.397 ; v1(13.014,6.77) 13.689,6.095 13.689,0.027 P2.1@15.113,-1.397 ; P1.1@29.464,-1.27 27.967,0.227 16.737,0.227 P2.1@15.113,-1.397 ; v1(29.564,10.347) v1(38.922,10.347) ; v1@38.922,10.328 R7.2@42.545,10.328 ; U7.2@75.438,2.667 75.438,1.787 76.657,0.568 96.707,0.568 97.926,-0.651 97.926,-2.038 98.485,-2.597 100.111,-2.597 100.746,-1.962 100.746,7.198 R8.2@101.319,7.198 101.508,7.198 v1(101.508,5.699)
VINDC: B2.1 D9.1 | length 9.3
  Top Layer w0.8: D9.1@87.757,1.941 90.968,-1.27 B2.1@95.758,-1.27
pads on no net: P3.2 U1.18 U1.19 U1.20 U1.21 U1.22 U4.22 U4.NC U5.22 U5.NC U6.22 U6.NC

## Polygon pours and split planes (outlines as drawn)
GND on Bottom Layer "Bottom Layer-No Net" (solid, remove dead copper, pour order 2): -0.508,-3.81 -0.762,-3.556 -0.762,59.674 134,59.674 134,-3.81 -0.889,-3.81 -1.016,-3.937
VCC on Top Layer "Bottom Layer-No Net" (solid, remove dead copper, pour order 4): -0.762,-3.81 -0.762,59.436 133.477,59.436 133.858,59.817 133.985,59.69 133.985,-4.064 -0.127,-4.064 -0.381,-3.81

## Keep-outs
Keep-Out Layer:
  circle w0.254: c2.54,10.017 r2.546
  circle w0.254: c2.54,48.752 r2.546
  lines w0.3: -0.762,-3.81 134,-3.81 134,59.674 -0.762,59.674 -0.762,-3.81

## Text inside footprints (layer, text, board x,y; h text height)
U7: Top Overlay "3" at 78.478,6.342 h1.5 r180; Top Overlay "2" at 75.938,6.342 h1.5 r180; Top Overlay "1" at 80.768,6.342 h1.5 r180